# EAGLE board soraduino_lite (EAGLE 6.2)
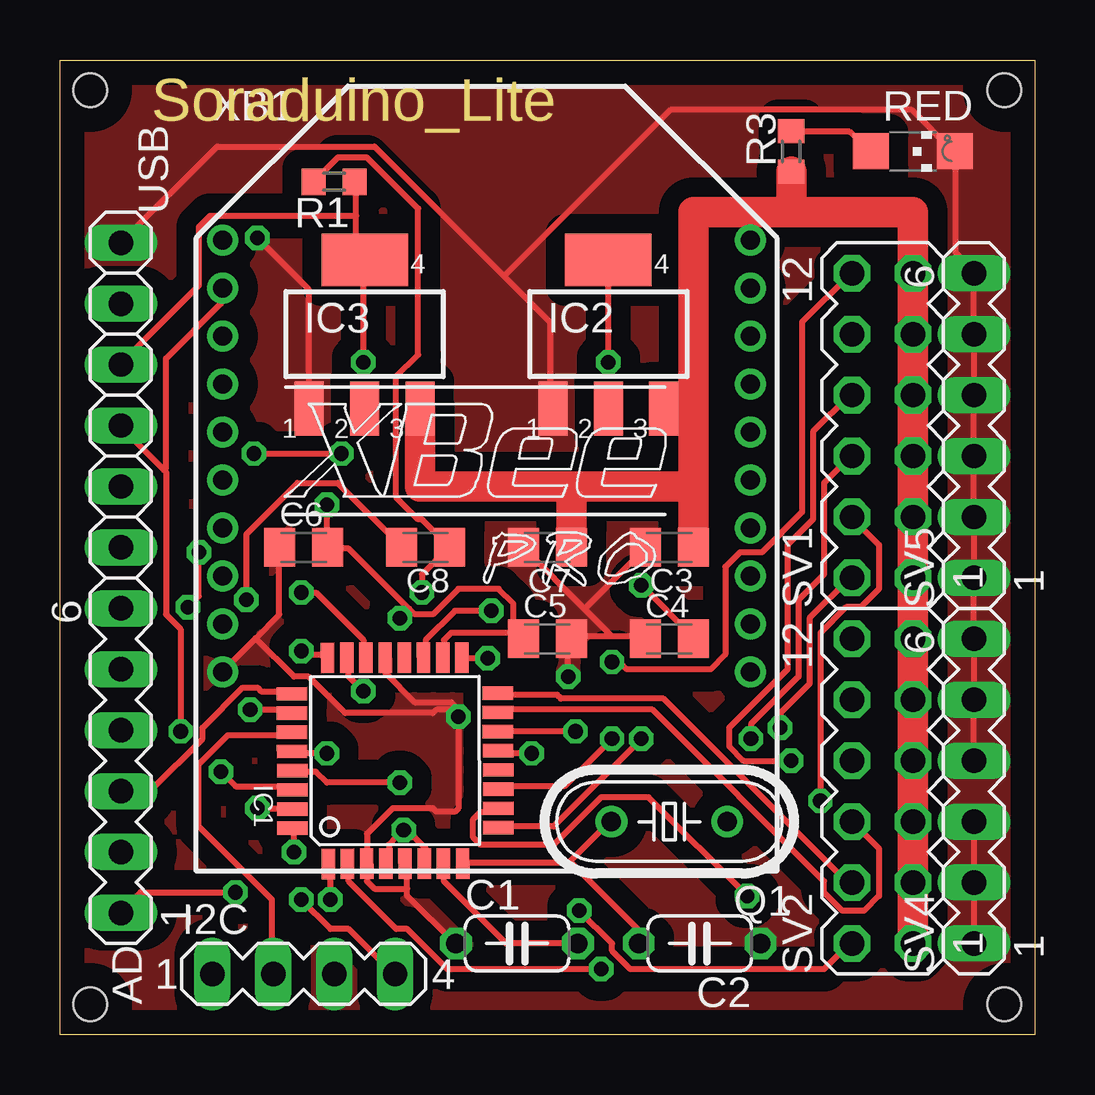
[diagram p0: board, top side]
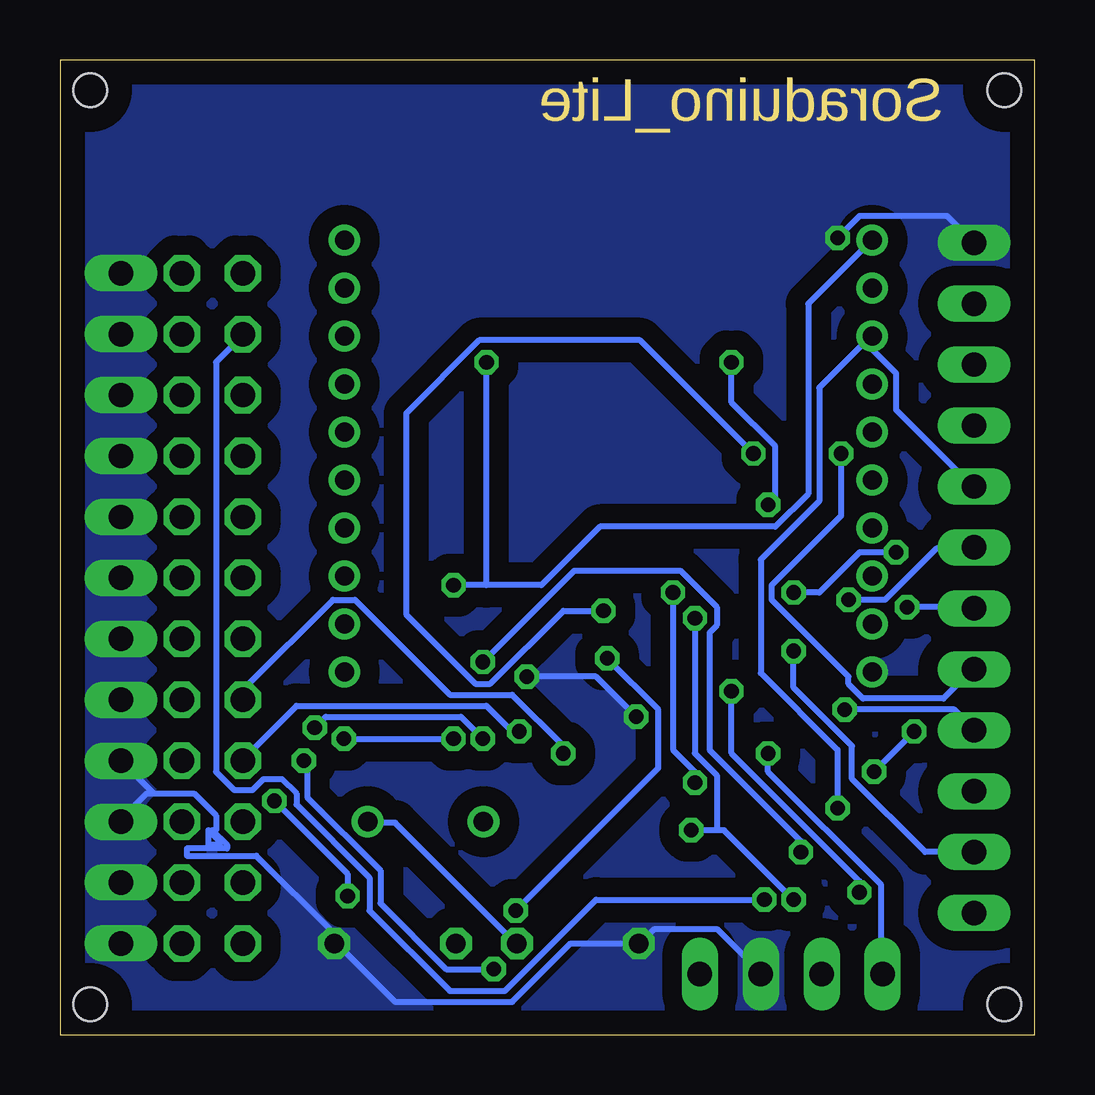
[diagram p1: board, bottom side, seen from below]

Size 40.64 x 40.64 mm. Coordinates in mm from the lower left corner, seen from the top.
Outline: 0,40.64 40.64,40.64 40.64,0 0,0 0,40.64
Copper layers (1*16): Top 0.035mm / dielectric 1.5mm / Bottom 0.035mm
Design rules: minimum track width 10mil, minimum drill 24mil, track to track 8mil, track to pad 8mil, pad to pad 8mil, via to via 8mil, smd to smd 8mil, copper to edge 40mil, drill to drill 8mil, minimum pad ring 10mil, minimum via ring 8mil, stop-mask expansion 4mil, vias tented up to drill 0mil, thermal gap 10mil
Holes 1.4 mm at 1.27,39.37 39.37,39.37 1.27,1.27 39.37,1.27

## Footprints (pad centres in the part's own frame; a part is rotated, then mirrored left to right if it is on the bottom)
MA06-1 = drill 1.016 long: 1 -6.35,0; 2 -3.81,0; 3 -1.27,0; 4 1.27,0; 5 3.81,0; 6 6.35,0
C050-024X044 = drill 0.813 octagon: 1 -2.54,0; 2 2.54,0
C0805K = smd 1.3 x 1.6: 1 -1,0; 2 1,0
MA04-1 = drill 1.016 long: 1 -3.81,0; 2 -1.27,0; 3 1.27,0; 4 3.81,0
TQFP32-08 = smd 1.27 x 0.559: 1 -4.293,2.8; 2 -4.293,2; 3 -4.293,1.2; 4 -4.293,0.4; 5 -4.293,-0.4; 6 -4.293,-1.2; 7 -4.293,-2; 8 -4.293,-2.8; 17 4.293,-2.8; 18 4.293,-2; 19 4.293,-1.2; 20 4.293,-0.4; 21 4.293,0.4; 22 4.293,1.2; 23 4.293,2; 24 4.293,2.8 | smd 0.559 x 1.27: 9 -2.8,-4.293; 10 -2,-4.293; 11 -1.2,-4.293; 12 -0.4,-4.293; 13 0.4,-4.293; 14 1.2,-4.293; 15 2,-4.293; 16 2.8,-4.293; 25 2.8,4.293; 26 2,4.293; 27 1.2,4.293; 28 0.4,4.293; 29 -0.4,4.293; 30 -1.2,4.293; 31 -2,4.293; 32 -2.8,4.293
SOT223 = smd 1.219 x 2.235: 1 -2.311,-3.099; 2 0,-3.099; 3 2.311,-3.099 | smd 3.6 x 2.2: 4 0,3.099
HC49/S = drill 0.813: 1 -2.413,0; 2 2.413,0
R0603 = smd 1 x 1.1: 1 -0.85,0; 2 0.85,0
CHIPLED_1206 = smd 1.5 x 1.5: A 0,-1.75; C 0,1.75
MA06-2 = drill 1.016 octagon: 1 -6.35,-1.27; 2 -6.35,1.27; 3 -3.81,-1.27; 4 -3.81,1.27; 5 -1.27,-1.27; 6 -1.27,1.27; 7 1.27,-1.27; 8 1.27,1.27; 9 3.81,-1.27; 10 3.81,1.27; 11 6.35,-1.27; 12 6.35,1.27
1X06 = drill 1.016 long: 1 -6.35,0; 2 -3.81,0; 3 -1.27,0; 4 1.27,0; 5 3.81,0; 6 6.35,0
XBEE-PRO = drill 0.8 pad 1.27: 1 -11,9; 2 -11,7; 3 -11,5; 4 -11,3; 5 -11,1; 6 -11,-1; 7 -11,-3; 8 -11,-5; 9 -11,-7; 10 -11,-9; 11 11,-9; 12 11,-7; 13 11,-5; 14 11,-3; 15 11,-1; 16 11,1; 17 11,3; 18 11,5; 19 11,7; 20 11,9

## Placement (x,y rotation side)
AD  AD  [MA06-1]  2.54,11.43 90 top
C1  22p  [C050-024X044]  19.05,3.81 0 top
C2  22p  [C050-024X044]  26.67,3.81 180 top
C3  0.1u  [C0805K]  25.4,20.32 180 top
C4  47u  [C0805K]  25.4,16.51 0 top
C5  0.1u  [C0805K]  20.32,16.51 0 top
C6  47u  [C0805K]  10.16,20.32 0 top
C7  0.1u  [C0805K]  20.32,20.32 180 top
C8  0.1u  [C0805K]  15.24,20.32 180 top
I2C  I2C  [MA04-1]  10.16,2.54 0 top
IC1  ATMEGA168-AU  [TQFP32-08]  13.97,11.43 90.2 top
IC2  317EMP  [SOT223]  22.86,29.21 0 top
IC3  317EMP  [SOT223]  12.7,29.21 0 top
Q1  QT  [HC49/S]  25.4,8.89 180 top
R1  1k  [R0603]  11.43,35.56 180 top
R3  1k  [R0603]  30.48,36.83 90 top
RED  [CHIPLED_1206]  35.56,36.83 270 top
SV1  Servo0  [MA06-2]  34.29,25.4 90 top
SV2  Servo1  [MA06-2]  34.29,10.16 90 top
SV4  GND  [MA06-1]  38.1,10.16 90 top
SV5  GND  [MA06-1]  38.1,25.4 90 top
USB  [1X06]  2.54,26.67 90 top
XB1  XBEE-PRO  [XBEE-PRO]  17.78,24.13 0 top

## Library data of the parts
AD I2C SV1 SV2 SV4 SV5 = con-lstb; OC_FARNELL: unknown; OC_NEWARK: unknown
C1 C2 R1 R3 = rcl
C3-C8 = resistor
IC1 = Arduino-AVR
IC2 IC3 = linear
Q1 = crystal; OC_FARNELL: 1667008; OC_NEWARK: unknown
RED = led
USB = pinhead
XB1 = maxstream; MPN: XBP24-AWI-001; OC_FARNELL: 1337916; OC_NEWARK: 42M2667

## Nets
GND: C1.1 C2.1 C3.2 C4.1 C5.2 C6.1 C7.2 I2C.3 IC1.3 IC1.5 IC1.21 IC2.1 IC3.1 RED.C SV4.1 SV4.2 SV4.3 SV4.4 SV4.5 SV4.6 SV5.1 SV5.2 SV5.3 SV5.4 SV5.5 SV5.6 USB.6 XB1.10
N$1: C8.2 USB.1
N$2: C8.1 IC1.29 R1.2
N$3: IC1.30 USB.3 XB1.2
N$4: C1.2 IC1.7 Q1.1
N$5: C2.2 IC1.8 Q1.2
N$6: C4.2 IC2.4 XB1.1
N$7: C5.1 C6.2 I2C.4 IC1.4 IC1.6 IC1.18 IC3.4 R1.1 USB.4
N$8: IC1.32 SV1.12
N$9: IC1.1 SV1.10
N$10: R3.2 RED.A
N$11: IC1.2 SV1.8
N$12: IC1.9 SV1.6
N$13: IC1.10 SV1.4
N$14: IC1.11 SV1.2
N$15: IC1.12
N$16: IC1.13 SV2.10
N$17: IC1.14 SV2.8
N$18: IC1.15 SV2.6
N$19: IC1.16 SV2.4
N$20: IC1.17 SV2.2
N$21: AD.6 IC1.22
N$22: AD.5 IC1.19
N$23: AD.4 IC1.26
N$24: AD.3 IC1.25
N$25: AD.2 IC1.24
N$26: AD.1 IC1.23
N$31: I2C.1 IC1.28
N$32: I2C.2 IC1.27
N$33: IC1.31 USB.2 XB1.3
VCC: C3.1 C7.1 IC2.3 IC3.3 R3.1 SV1.1 SV1.3 SV1.5 SV1.7 SV1.9 SV1.11 SV2.1 SV2.3 SV2.5 SV2.7 SV2.9 SV2.11

## Tracks (layer width: path | path; a pad name or v marks a point on that pad's centre or on a via)
GND  (via drill 0.61)
  Top 0.254: 14.48,6.1 14.48,5.79 16.46,3.81 C1.1 | 14.48,6.1 14.48,7.01 IC1.5 | 8.15,16.54 6.86,15.24 XB1.10 | 8.15,16.54 9.14,17.53 9.14,20.27 C6.1 | 23.01,16.61 24.38,16.61 C4.1 | 23.01,16.61 21.34,16.61 C5.2 21.18,16.46 v21.18,14.94 | 23.01,16.61 21.87,17.75 | 21.87,17.75 19.36,20.27 C7.2 | 21.87,17.75 24.38,20.27 C3.2 | v16.61,13.26 16.61,13.56 16.31,13.87 14.78,13.87 13.56,15.09 13.56,15.7 IC1.21 | v16.61,13.26 16.61,9.45 16.46,9.3 15.7,9.3 15.54,9.45 13.87,9.45 12.8,8.38 12.8,7.16 IC1.3 12.8,7.01 12.8,6.4 13.11,6.1 14.48,6.1 | 8.15,16.54 9.75,14.94 10.36,14.94 11.89,13.41 15.54,13.41 15.7,13.56 16.46,13.56 v16.61,13.26 | v8.23,33.22 10.36,31.09 10.36,26.21 IC3.1 | 18.52,31.62 13.11,37.03 6.55,37.03 USB.6 | 18.52,31.62 20.42,29.72 20.42,26.21 IC2.1 | SV4.1 SV4.2 SV4.3 | SV4.4 SV4.5 SV4.6 SV5.1 SV5.2 SV5.3 SV5.4 SV5.5 SV5.6 38.1,31.85 37.34,32.61 37.34,36.73 RED.C 37.19,36.88 35.51,38.56 25.45,38.56 18.52,31.62
  Bottom 0.254: I2C.3 11.43,2.59 13.26,4.42 15.85,4.42 16.46,3.81 C1.1 19.36,3.81 21.79,1.37 26.67,1.37 29.11,3.81 C2.1 29.26,3.81 29.26,4.27 32.46,7.47 35.36,7.47 35.36,7.77 33.68,7.77 33.68,7.92 34.29,8.53 34.44,8.53 34.44,7.92 33.98,7.92 33.98,8.08 34.29,8.38 34.14,8.53 34.14,9.14 35.05,10.06 36.73,10.06 | v21.18,14.94 18.29,14.94 v16.61,13.26 | v8.23,33.22 7.32,34.14 3.66,34.14 USB.6 | 36.73,10.06 37.03,10.06 38.1,8.99 SV4.3 | 36.73,10.06 SV4.4
  pour Top (isolate 0.813, no thermals): 0,40.64 40.64,40.64 40.64,0 0,0
  pour Bottom (isolate 0.813, no thermals): 0,40.64 40.64,40.64 40.64,0 0,0
N$1  (via drill 0.61)
  Top 0.254: v7.77,18.14 7.77,20.88 9.91,23.01 11.58,23.01 14.17,20.42 C8.2
  Bottom 0.254: v7.77,18.14 6.25,18.14 4.12,20.27 2.59,20.27 USB.1
N$2  (via drill 0.61)
  Top 0.254: R1.2 10.67,35.66 11.58,36.58 12.8,36.58 14.94,34.44 14.94,28.35 14.02,27.43 14.02,22.4 14.94,21.49 15.09,21.49 16.15,20.42 C8.1 16.15,20.27 15.09,19.2 v15.09,18.44 | v14.17,10.52 11.12,10.52 10.67,10.97 9.75,10.97 IC1.29
  Bottom 0.254: v14.17,10.52 14.17,10.97 15.09,11.89 v15.09,18.44
N$3  (via drill 0.61)
  Top 0.254: v6.71,10.97 7.32,10.36 9.6,10.36 IC1.30 | v5.03,12.65 5.03,16.92 4.42,17.53 4.42,23.47 4.34,23.55 | 4.34,23.55 2.59,25.3 USB.3 | XB1.2 6.71,31.09 6.71,30.48 4.42,28.19 4.42,23.62 4.34,23.55
  Bottom 0.254: v5.03,12.65 v6.71,10.97
N$4
  Top 0.254: C1.2 18.59,3.81 16,6.4 16,7.01 IC1.7
  Bottom 0.254: Q1.1 27.74,8.84 26.67,8.84 21.64,3.81 C1.2
N$5
  Top 0.254: 21.26,7.24 22.86,8.84 Q1.2 | 21.26,7.24 21.18,7.16 16.92,7.16 IC1.8 | 21.26,7.24 24.08,4.42 24.08,3.81 C2.2
N$6  (via drill 0.61)
  Top 0.254: v24.23,18.75 26.36,16.61 C4.2 | v22.86,28.04 IC2.4
  Bottom 0.254: 22.86,18.75 20.57,18.75 18.14,21.18 10.82,21.18 9.45,22.55 9.45,30.48 6.86,33.07 XB1.1 | 22.86,18.75 v24.23,18.75 | 22.86,18.75 v22.86,28.04
N$7  (via drill 0.61)
  Top 0.254: 12.34,34.14 12.34,32.77 12.65,32.46 IC3.4 12.65,32.31 v12.65,28.04 | 12.34,34.14 12.34,35.51 R1.1 | 12.34,34.14 6.25,34.14 5.79,33.68 5.79,31.24 2.59,28.04 USB.4 | 14.33,8.23 14.78,8.23 15.24,7.77 15.24,7.16 IC1.6 | 14.33,8.23 14.02,8.23 13.72,7.92 13.72,7.16 IC1.4 | v14.33,8.53 14.33,8.23 | v10.06,5.64 11.28,4.42 12.04,4.42 13.87,2.59 I2C.4 | 18.9,16.76 19.05,16.76 19.2,16.61 C5.1 18.9,16.76 | 18.9,16.76 16.31,16.76 16,16.46 16,15.85 IC1.18 | 14.55,17.75 14.78,17.53 15.54,17.53 16.61,18.59 18.29,18.59 18.9,17.98 18.9,16.76 | 14.55,17.75 12.04,20.27 11.28,20.27 C6.2 11.12,20.42 v11.12,22.1 | 14.55,17.75 v14.17,17.37
  Bottom 0.254: 13.26,8.53 12.95,8.53 v10.06,5.64 | 13.26,8.53 v14.33,8.53 | 13.26,8.53 13.26,10.82 14.17,11.73 v14.17,17.37 | v12.65,28.04 12.65,26.36 10.82,24.54 10.82,22.4 v11.12,22.1
N$8  (via drill 0.61)
  Top 0.254: v9.75,7.62 9.75,8.53 IC1.32 | v23.01,15.54 23.32,15.54 23.62,15.24 27.13,15.24 27.74,15.85 27.74,19.51 28.35,20.12 29.26,20.12 30.94,21.79 30.94,29.72 32.92,31.7 SV1.12
  Bottom 0.254: v9.75,7.62 9.75,8.08 13.56,11.89 13.56,16.76 13.26,17.07 13.26,17.83 14.78,19.36 19.2,19.36 v23.01,15.54
N$9  (via drill 0.61)
  Top 0.254: v11.28,5.64 11.28,7.01 IC1.1
  Bottom 0.254: v11.28,5.64 18.29,5.64 22.1,1.83 24.38,1.83 27.74,5.18 27.74,6.55 30.79,9.6 30.79,10.06 31.39,10.67 32.16,10.67 32.61,10.21 33.38,10.21 34.14,10.97 34.14,28.04 33.07,29.11 SV1.10
N$10
  Top 0.254: R3.2 30.48,37.64 32.92,37.64 33.68,36.88 RED.A
N$11  (via drill 0.61)
  Top 0.254: v22.55,2.74 16.15,2.74 14.48,4.42 14.02,4.42 12.04,6.4 12.04,7.01 IC1.2 | v30.48,11.43 28.5,11.43 27.89,12.04 27.89,12.8 30.33,15.24 30.33,20.42 31.39,21.49 31.39,25.15 32.92,26.67 SV1.8
  Bottom 0.254: v22.55,2.74 24.54,2.74 27.28,5.49 27.28,6.86 30.33,9.91 30.33,11.28 v30.48,11.43
N$12  (via drill 0.61)
  Top 0.254: v24.23,12.34 20.57,8.69 18.29,8.69 IC1.9 | v28.8,12.34 28.8,12.95 30.79,14.94 30.79,18.14 31.85,19.2 31.85,23.01 32.92,24.08 SV1.6
  Bottom 0.254: v28.8,12.34 v24.23,12.34
N$13  (via drill 0.61)
  Top 0.254: v28.65,5.79 24.54,9.91 22.55,9.91 20.57,7.92 17.53,7.92 17.22,8.23 17.22,8.99 17.53,9.3 18.14,9.3 IC1.10 | v31.7,9.75 31.7,16.76 32.77,17.83 33.38,17.83 34.14,18.59 34.14,20.42 33.07,21.49 SV1.4
  Bottom 0.254: v28.65,5.79 28.65,6.71 v31.7,9.75
N$14  (via drill 0.61)
  Top 0.254: v23.01,12.34 21.03,10.36 18.29,10.36 IC1.11 | v30.02,12.8 30.02,13.41 31.24,14.63 31.24,17.37 32.92,19.05 SV1.2
  Bottom 0.254: v23.01,12.34 23.93,13.26 29.57,13.26 v30.02,12.8
N$16  (via drill 0.61)
  Top 0.254: v19.66,11.73 18.29,11.73 IC1.13
  Bottom 0.254: v19.66,11.73 19.66,12.04 21.79,14.17 24.38,14.17 28.35,18.14 29.26,18.14 32.92,14.48 32.92,14.02 SV2.10
N$17  (via drill 0.61)
  Top 0.254: v21.49,12.65 18.29,12.65 IC1.14
  Bottom 0.254: v21.49,12.65 21.79,12.65 22.86,13.72 30.79,13.72 33.07,11.43 SV2.8
N$18
  Top 0.254: SV2.6 34.14,7.77 34.14,5.79 33.53,5.18 32.61,5.18 31.85,5.94 31.85,6.4 24.69,13.56 18.29,13.56 IC1.15
N$19
  Top 0.254: IC1.16 18.29,14.17 20.73,14.17 20.88,14.02 25.15,14.02 32.92,6.25 SV2.4
N$20  (via drill 0.61)
  Top 0.254: v17.83,15.7 16.76,15.7 IC1.17 | v21.64,5.18 23.01,3.81 23.01,3.5 23.77,2.74 31.85,2.74 32.92,3.81 SV2.2
  Bottom 0.254: v17.83,15.7 15.7,13.56 15.7,11.12 v21.64,5.18
N$21  (via drill 0.61)
  Top 0.254: v10.06,18.44 10.67,18.44 12.65,16.46 12.65,15.85 IC1.22 | v5.79,20.12 5.79,18.29 v5.33,17.83
  Bottom 0.254: v10.06,18.44 8.99,18.44 7.32,20.12 v5.79,20.12 | v5.33,17.83 2.59,17.83 AD.6
N$22  (via drill 0.61)
  Top 0.254: v17.98,17.68 16.46,17.68 15.24,16.46 15.24,15.85 IC1.19 | v8.08,24.23 v11.73,24.23
  Bottom 0.254: v17.98,17.68 19.66,17.68 22.71,14.63 23.32,14.63 26.21,17.53 26.21,25.91 23.16,28.96 16.46,28.96 v11.73,24.23 | v8.08,24.23 8.08,21.64 10.97,18.75 10.97,18.14 7.77,14.94 7.77,14.63 7.16,14.02 3.81,14.02 2.59,15.24 AD.5
N$23  (via drill 0.61)
  Top 0.254: v7.92,13.56 9.6,13.56 IC1.26
  Bottom 0.254: v7.92,13.56 3.35,13.56 2.59,12.8 AD.4
N$24
  Top 0.254: IC1.25 9.6,14.33 8.38,14.33 8.23,14.48 7.62,14.48 5.94,12.8 5.94,12.34 3.81,10.21 2.59,10.21 AD.3
N$25  (via drill 0.61)
  Top 0.254: v10.06,16 10.21,15.85 11.12,15.85 IC1.24
  Bottom 0.254: v10.06,16 10.06,14.48 7.62,12.04 7.62,10.67 4.57,7.62 AD.2
N$26  (via drill 0.61)
  Top 0.254: v12.65,14.33 12.04,14.94 12.04,15.7 IC1.23 | v7.32,5.94 3.35,5.94 2.59,5.18 AD.1
  Bottom 0.254: v12.65,14.33 12.65,11.73 7.32,6.4 v7.32,5.94
N$31  (via drill 0.61)
  Top 0.254: v11.12,11.73 9.75,11.73 IC1.28
  Bottom 0.254: v11.12,11.73 11.12,10.97 6.4,6.25 6.4,2.59 I2C.1
N$32
  Top 0.254: IC1.27 9.6,12.5 7.01,12.5 5.79,11.28 5.79,8.69 8.84,5.64 8.84,2.59 I2C.2
N$33  (via drill 0.61)
  Top 0.254: v8.23,9.45 9.6,9.45 IC1.31
  Bottom 0.254: v8.23,9.45 8.23,11.89 11.43,15.09 11.43,19.81 8.99,22.25 8.99,26.98 6.86,29.11 XB1.3 7.01,28.8 5.79,27.58 5.79,26.06 2.59,22.86 USB.2
VCC
  Top 1.27: SV2.1 SV2.3 SV2.5 SV2.7 SV2.9 SV2.11 SV1.1 SV1.3 SV1.5 SV1.7 SV1.9 SV1.11 35.56,34.29 30.48,34.29 | 30.48,34.29 R3.1 | IC2.3 26.4,26.11 | 26.4,26.11 26.4,22.86 | C3.1 26.4,22.86 | 26.4,26.11 26.4,34.29 30.48,34.29 | C7.1 21.32,22.86 | 21.32,22.86 26.4,22.86 | IC3.3 15.01,22.86 21.32,22.86

## Text on the board
Dimension: Soraduino_Lite